# Altium PCB PCB1.PcbDoc (part 7 of 12)
Units mm, origin at the board's own origin, x right, y up, seen from the top; angles counter-clockwise.
Board outline 122.17 x 121.67 mm, 2 copper layers (Top Layer, Bottom Layer); 274 components, 225 nets, 941 pads, 421 vias.
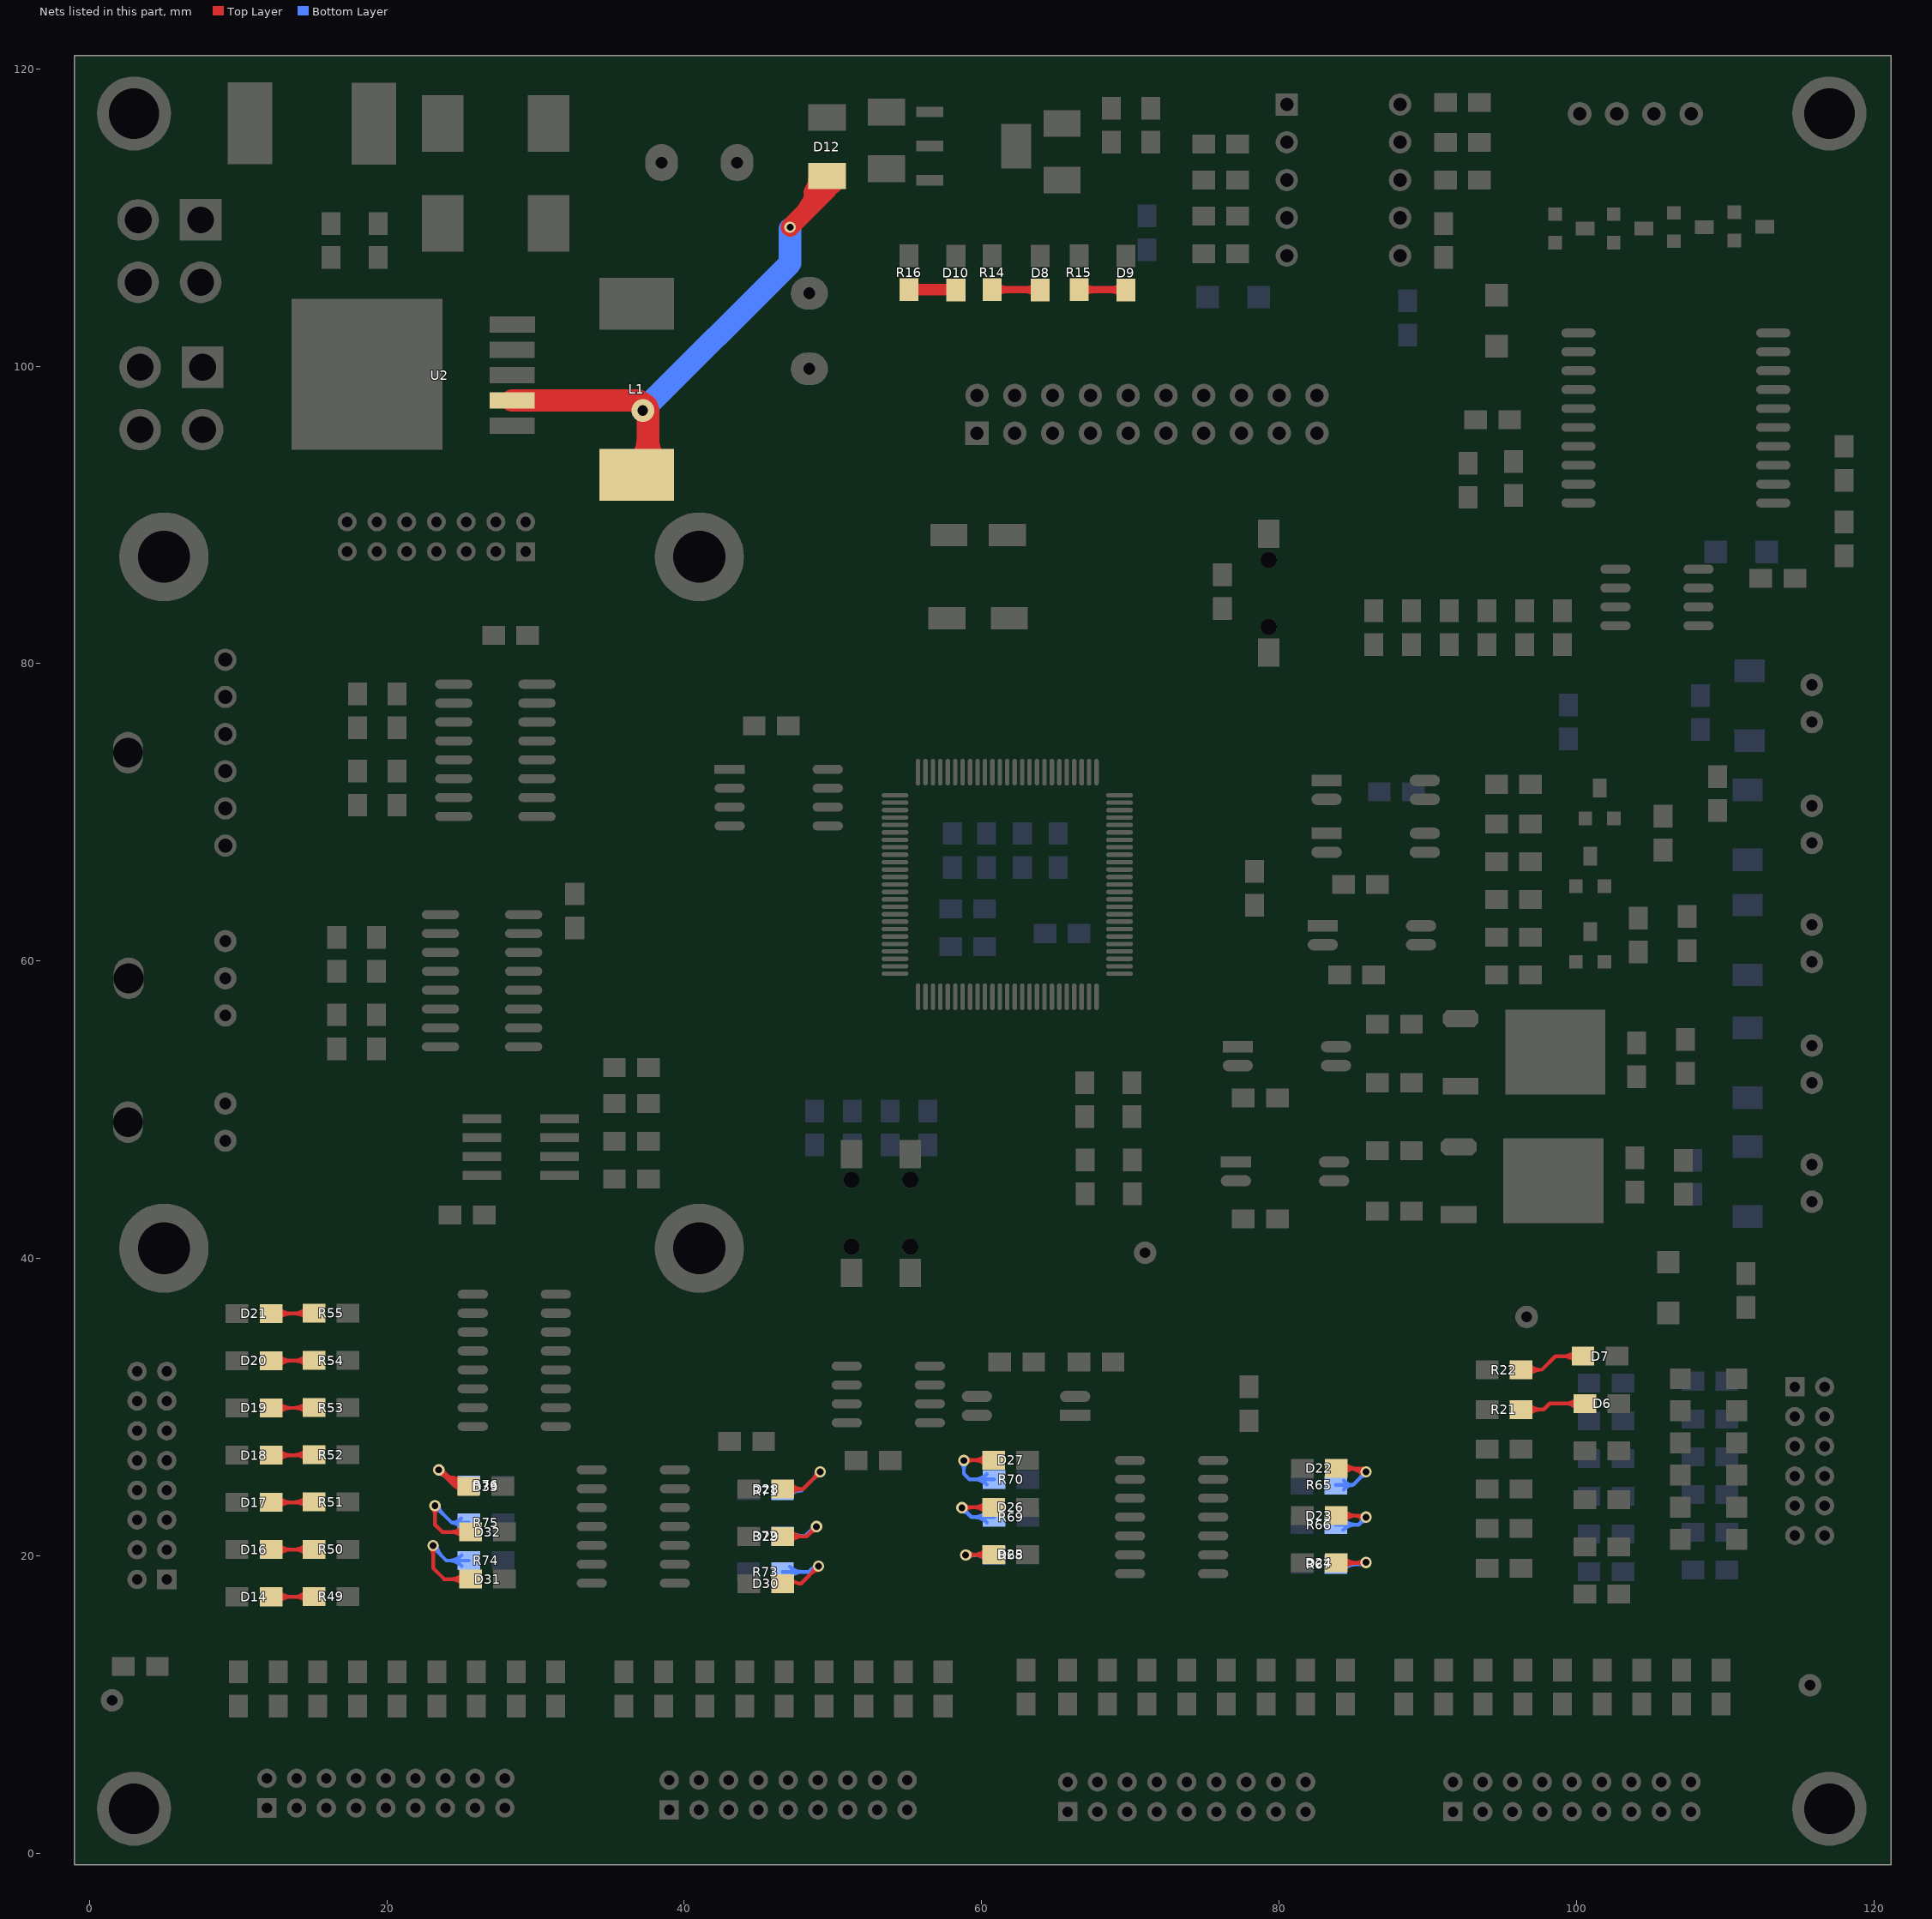
[diagram p7: the nets of this part, all layers, seen from the top]

## Via types
v1: diameter 0.762, hole 0.457, Top Layer to Bottom Layer, 339 vias
v2: diameter 1.27, hole 0.457, Top Layer to Bottom Layer, 39 vias
v3: diameter 0.889, hole 0.457, Top Layer to Bottom Layer, 21 vias
v4: diameter 1.27, hole 0.711, Top Layer to Bottom Layer, 12 vias
v5: diameter 1.524, hole 0.711, Top Layer to Bottom Layer, 5 vias
v6: diameter 1.016, hole 0.457, Top Layer to Bottom Layer, 3 vias
v7: diameter 0.711, hole 0.457, Top Layer to Bottom Layer, 1 vias
v8: diameter 1.524, hole 0.457, Top Layer to Bottom Layer, 1 vias

## Nets (pads, with @x,y where several pads share a name; then routed paths per layer and width w, separated by ;. In a path a pad name is that pad's centre, name@x,y a point inside that pad or via, vN(x,y) a via of type N, cw(c..) or ccw(c..) an arc to the next point about the centre after c; other vN are vias at no path point) (continued)
NetD6_1: D6.1 R21.2 | length 19.9
  Top Layer w0.254: R21.2@96.266,29.845 97.79,29.845 98.194,30.249 D6.1@100.56,30.249 ; R21.2@96.752,29.486 cw(c97.619,28.619) 97.619,29.845 ; R21.2@96.752,29.486 cw(c97.619,28.619) 97.619,29.845 ; R21.2@96.752,29.486 cw(c97.619,28.619) 97.619,29.845 ; R21.2@96.752,29.486 cw(c97.619,28.619) 97.619,29.845 ; R21.2@96.752,30.204 ccw(c97.619,31.071) 97.619,29.845 ; R21.2@96.752,30.204 ccw(c97.619,31.071) 97.619,29.845 ; R21.2@96.752,30.204 ccw(c97.619,31.071) 97.619,29.845 ; R21.2@96.752,30.204 ccw(c97.619,31.071) 97.619,29.845 ; 99.207,30.249 cw(c99.207,29.023) D6.1@100.074,29.89 ; 99.207,30.249 ccw(c99.207,31.476) D6.1@100.074,30.608 ; 99.207,30.249 cw(c99.207,29.023) D6.1@100.074,29.89 ; 99.207,30.249 ccw(c99.207,31.476) D6.1@100.074,30.608 ; 99.207,30.249 cw(c99.207,29.023) D6.1@100.074,29.89 ; 99.207,30.249 ccw(c99.207,31.476) D6.1@100.074,30.608 ; 99.207,30.249 cw(c99.207,29.023) D6.1@100.074,29.89 ; 99.207,30.249 ccw(c99.207,31.476) D6.1@100.074,30.608
NetD7_1: D7.1 R22.2 | length 20
  Top Layer w0.254: R22.2@96.266,32.512 97.663,32.512 98.575,33.424 D7.1@100.433,33.424 ; R22.2@96.752,32.153 cw(c97.619,31.286) 97.619,32.512 ; R22.2@96.752,32.153 cw(c97.619,31.286) 97.619,32.512 ; R22.2@96.752,32.153 cw(c97.619,31.286) 97.619,32.512 ; R22.2@96.752,32.153 cw(c97.619,31.286) 97.619,32.512 ; R22.2@96.752,32.871 ccw(c97.619,33.738) 97.619,32.512 ; R22.2@96.752,32.871 ccw(c97.619,33.738) 97.619,32.512 ; R22.2@96.752,32.871 ccw(c97.619,33.738) 97.619,32.512 ; R22.2@96.752,32.871 ccw(c97.619,33.738) 97.619,32.512 ; 99.08,33.424 cw(c99.08,32.198) D7.1@99.947,33.065 ; 99.08,33.424 ccw(c99.08,34.651) D7.1@99.947,33.783 ; 99.08,33.424 cw(c99.08,32.198) D7.1@99.947,33.065 ; 99.08,33.424 ccw(c99.08,34.651) D7.1@99.947,33.783 ; 99.08,33.424 cw(c99.08,32.198) D7.1@99.947,33.065 ; 99.08,33.424 ccw(c99.08,34.651) D7.1@99.947,33.783 ; 99.08,33.424 cw(c99.08,32.198) D7.1@99.947,33.065 ; 99.08,33.424 ccw(c99.08,34.651) D7.1@99.947,33.783
NetD8_1: D8.1 R14.2 | length 8.9
  Top Layer w0.508: R14.2@60.706,105.156 63.834,105.156 D8.1@63.858,105.132 ; 61.626,105.156 cw(c61.626,106.076) 60.975,105.425 ccw(c61.626,106.076) 61.626,105.156 ; 61.626,105.156 ccw(c61.626,104.236) 60.975,104.887 cw(c61.626,104.236) 61.626,105.156 ; 62.961,105.156 cw(c62.961,104.156) 63.669,104.863 ccw(c62.961,104.156) 62.961,105.156 ; 63.075,105.156 ccw(c63.075,105.995) 63.669,105.402 cw(c63.075,105.995) 63.075,105.156
NetD9_1: D9.1 R15.2 | length 8.9
  Top Layer w0.508: R15.2@66.548,105.156 69.676,105.156 D9.1@69.7,105.132 ; 67.468,105.156 cw(c67.468,106.076) 66.817,105.425 ccw(c67.468,106.076) 67.468,105.156 ; 67.468,105.156 ccw(c67.468,104.236) 66.817,104.887 cw(c67.468,104.236) 67.468,105.156 ; 68.723,105.156 cw(c68.723,104.156) 69.43,104.863 ccw(c68.723,104.156) 68.723,105.156 ; 68.837,105.156 ccw(c68.837,105.995) 69.43,105.402 cw(c68.837,105.995) 68.837,105.156
NetD10_1: D10.1 R16.2 | length 4.3
  Top Layer w0.762: R16.2@55.118,105.156 58.246,105.156 D10.1@58.27,105.132 ; 57.6,105.156 cw(c57.6,104.462) 58.09,104.953 ccw(c57.6,104.462) 57.6,105.156
NetD12_2: D12.2 L1.1 U2.2 | length 73.2
  Top Layer w1.27: L1.1@36.773,93.494 ccw(c34.869,95.398) 37.561,95.398 ccw(c40.253,95.398) L1.1@38.349,93.494 ; v1(47.117,109.347) 49.599,111.829 D12.2@49.599,112.791 ; 47.834,110.064 ccw(c45.106,112.791) D12.2@48.964,112.791 ; 47.834,110.064 ccw(c45.106,112.791) D12.2@48.964,112.791 ; 47.834,110.064 ccw(c45.106,112.791) D12.2@48.964,112.791 ; 47.834,110.064 ccw(c45.106,112.791) D12.2@48.964,112.791 ; 48.669,111.69 cw(c50.07,111.315) D12.2@49.345,112.571 ; 48.669,111.69 cw(c50.07,111.315) D12.2@49.345,112.571 ; 48.669,111.69 cw(c50.07,111.315) D12.2@49.345,112.571 ; 48.669,111.69 cw(c50.07,111.315) D12.2@49.345,112.571 ; 48.669,111.69 cw(c50.07,111.315) D12.2@49.345,112.571 ; 48.669,111.69 cw(c50.07,111.315) D12.2@49.345,112.571 ; D12.2@50.002,112.232 ccw(c49.443,112.791) D12.2@50.234,112.791 ; D12.2@50.002,112.232 ccw(c49.443,112.791) D12.2@50.234,112.791 ; D12.2@50.002,112.232 ccw(c49.443,112.791) D12.2@50.234,112.791 ; D12.2@50.002,112.232 ccw(c49.443,112.791) D12.2@50.234,112.791
  Top Layer w1.524: U2.2@28.433,97.7 36.898,97.7 37.561,97.037 L1.1@37.561,94.107 ; L1.1@36.862,93.405 ccw(c35.176,95.091) 37.561,95.091 ccw(c39.946,95.091) L1.1@38.26,93.405 ; 36.508,97.7 cw(c36.508,96.325) v5@37.48,97.297 ; 36.508,97.7 cw(c36.508,96.325) v5@37.48,97.297 ; 36.508,97.7 cw(c36.508,96.325) v5@37.48,97.297 ; L1.1@36.85,93.405 ccw(c35.135,95.12) 37.561,95.12 cw(c35.135,95.12) L1.1@36.85,93.405 ; 37.561,95.062 ccw(c39.905,95.062) 38.248,93.405 cw(c39.905,95.062) 37.561,95.062
  Bottom Layer w1.524: v5(37.211,97.028) 47.117,106.934 v1@47.117,109.22
NetD14_1: D14.1 R49.1 | length 20.5
  Top Layer w0.254: D14.1@12.216,17.249 15.09,17.249 R49.1@15.113,17.272 ; D14.1@12.702,16.89 cw(c13.569,16.022) 13.569,17.249 ; D14.1@12.702,16.89 cw(c13.569,16.022) 13.569,17.249 ; D14.1@12.702,16.89 cw(c13.569,16.022) 13.569,17.249 ; D14.1@12.702,16.89 cw(c13.569,16.022) 13.569,17.249 ; D14.1@12.702,17.608 ccw(c13.569,18.475) 13.569,17.249 ; D14.1@12.702,17.608 ccw(c13.569,18.475) 13.569,17.249 ; D14.1@12.702,17.608 ccw(c13.569,18.475) 13.569,17.249 ; D14.1@12.702,17.608 ccw(c13.569,18.475) 13.569,17.249 ; 13.704,17.249 ccw(c13.704,18.554) R49.1@14.627,17.631 ; 13.704,17.249 ccw(c13.704,18.554) R49.1@14.627,17.631 ; 13.704,17.249 ccw(c13.704,18.554) R49.1@14.627,17.631 ; 13.704,17.249 ccw(c13.704,18.554) R49.1@14.627,17.631 ; 13.816,17.249 cw(c13.816,16.102) R49.1@14.627,16.913 ; 13.816,17.249 cw(c13.816,16.102) R49.1@14.627,16.913 ; 13.816,17.249 cw(c13.816,16.102) R49.1@14.627,16.913 ; 13.816,17.249 cw(c13.816,16.102) R49.1@14.627,16.913 ; 14.317,17.249 ccw(c14.317,17.941) R49.1@14.806,17.452 ; 14.317,17.249 ccw(c14.317,17.941) R49.1@14.806,17.452 ; 14.317,17.249 ccw(c14.317,17.941) R49.1@14.806,17.452 ; 14.317,17.249 ccw(c14.317,17.941) R49.1@14.806,17.452
NetD16_1: D16.1 R50.1 | length 20.5
  Top Layer w0.254: D16.1@12.216,20.424 15.09,20.424 R50.1@15.113,20.447 ; D16.1@12.702,20.065 cw(c13.569,19.197) 13.569,20.424 ; D16.1@12.702,20.065 cw(c13.569,19.197) 13.569,20.424 ; D16.1@12.702,20.065 cw(c13.569,19.197) 13.569,20.424 ; D16.1@12.702,20.065 cw(c13.569,19.197) 13.569,20.424 ; D16.1@12.702,20.783 ccw(c13.569,21.65) 13.569,20.424 ; D16.1@12.702,20.783 ccw(c13.569,21.65) 13.569,20.424 ; D16.1@12.702,20.783 ccw(c13.569,21.65) 13.569,20.424 ; D16.1@12.702,20.783 ccw(c13.569,21.65) 13.569,20.424 ; 13.704,20.424 ccw(c13.704,21.729) R50.1@14.627,20.806 ; 13.704,20.424 ccw(c13.704,21.729) R50.1@14.627,20.806 ; 13.704,20.424 ccw(c13.704,21.729) R50.1@14.627,20.806 ; 13.704,20.424 ccw(c13.704,21.729) R50.1@14.627,20.806 ; 13.816,20.424 cw(c13.816,19.277) R50.1@14.627,20.088 ; 13.816,20.424 cw(c13.816,19.277) R50.1@14.627,20.088 ; 13.816,20.424 cw(c13.816,19.277) R50.1@14.627,20.088 ; 13.816,20.424 cw(c13.816,19.277) R50.1@14.627,20.088 ; 14.317,20.424 ccw(c14.317,21.116) R50.1@14.806,20.627 ; 14.317,20.424 ccw(c14.317,21.116) R50.1@14.806,20.627 ; 14.317,20.424 ccw(c14.317,21.116) R50.1@14.806,20.627 ; 14.317,20.424 ccw(c14.317,21.116) R50.1@14.806,20.627
NetD17_1: D17.1 R51.1 | length 20.5
  Top Layer w0.254: D17.1@12.216,23.599 15.09,23.599 R51.1@15.113,23.622 ; D17.1@12.702,23.24 cw(c13.569,22.372) 13.569,23.599 ; D17.1@12.702,23.24 cw(c13.569,22.372) 13.569,23.599 ; D17.1@12.702,23.24 cw(c13.569,22.372) 13.569,23.599 ; D17.1@12.702,23.24 cw(c13.569,22.372) 13.569,23.599 ; D17.1@12.702,23.958 ccw(c13.569,24.825) 13.569,23.599 ; D17.1@12.702,23.958 ccw(c13.569,24.825) 13.569,23.599 ; D17.1@12.702,23.958 ccw(c13.569,24.825) 13.569,23.599 ; D17.1@12.702,23.958 ccw(c13.569,24.825) 13.569,23.599 ; 13.704,23.599 ccw(c13.704,24.904) R51.1@14.627,23.981 ; 13.704,23.599 ccw(c13.704,24.904) R51.1@14.627,23.981 ; 13.704,23.599 ccw(c13.704,24.904) R51.1@14.627,23.981 ; 13.704,23.599 ccw(c13.704,24.904) R51.1@14.627,23.981 ; 13.816,23.599 cw(c13.816,22.452) R51.1@14.627,23.263 ; 13.816,23.599 cw(c13.816,22.452) R51.1@14.627,23.263 ; 13.816,23.599 cw(c13.816,22.452) R51.1@14.627,23.263 ; 13.816,23.599 cw(c13.816,22.452) R51.1@14.627,23.263 ; 14.317,23.599 ccw(c14.317,24.291) R51.1@14.806,23.802 ; 14.317,23.599 ccw(c14.317,24.291) R51.1@14.806,23.802 ; 14.317,23.599 ccw(c14.317,24.291) R51.1@14.806,23.802 ; 14.317,23.599 ccw(c14.317,24.291) R51.1@14.806,23.802
NetD18_1: D18.1 R52.1 | length 20.5
  Top Layer w0.254: D18.1@12.216,26.774 15.09,26.774 R52.1@15.113,26.797 ; D18.1@12.702,26.415 cw(c13.569,25.547) 13.569,26.774 ; D18.1@12.702,26.415 cw(c13.569,25.547) 13.569,26.774 ; D18.1@12.702,26.415 cw(c13.569,25.547) 13.569,26.774 ; D18.1@12.702,26.415 cw(c13.569,25.547) 13.569,26.774 ; D18.1@12.702,27.133 ccw(c13.569,28) 13.569,26.774 ; D18.1@12.702,27.133 ccw(c13.569,28) 13.569,26.774 ; D18.1@12.702,27.133 ccw(c13.569,28) 13.569,26.774 ; D18.1@12.702,27.133 ccw(c13.569,28) 13.569,26.774 ; 13.704,26.774 ccw(c13.704,28.079) R52.1@14.627,27.156 ; 13.704,26.774 ccw(c13.704,28.079) R52.1@14.627,27.156 ; 13.704,26.774 ccw(c13.704,28.079) R52.1@14.627,27.156 ; 13.704,26.774 ccw(c13.704,28.079) R52.1@14.627,27.156 ; 13.816,26.774 cw(c13.816,25.627) R52.1@14.627,26.438 ; 13.816,26.774 cw(c13.816,25.627) R52.1@14.627,26.438 ; 13.816,26.774 cw(c13.816,25.627) R52.1@14.627,26.438 ; 13.816,26.774 cw(c13.816,25.627) R52.1@14.627,26.438 ; 14.317,26.774 ccw(c14.317,27.466) R52.1@14.806,26.977 ; 14.317,26.774 ccw(c14.317,27.466) R52.1@14.806,26.977 ; 14.317,26.774 ccw(c14.317,27.466) R52.1@14.806,26.977 ; 14.317,26.774 ccw(c14.317,27.466) R52.1@14.806,26.977
NetD19_1: D19.1 R53.1 | length 20.5
  Top Layer w0.254: D19.1@12.216,29.949 15.09,29.949 R53.1@15.113,29.972 ; D19.1@12.702,29.59 cw(c13.569,28.722) 13.569,29.949 ; D19.1@12.702,29.59 cw(c13.569,28.722) 13.569,29.949 ; D19.1@12.702,29.59 cw(c13.569,28.722) 13.569,29.949 ; D19.1@12.702,29.59 cw(c13.569,28.722) 13.569,29.949 ; D19.1@12.702,30.308 ccw(c13.569,31.175) 13.569,29.949 ; D19.1@12.702,30.308 ccw(c13.569,31.175) 13.569,29.949 ; D19.1@12.702,30.308 ccw(c13.569,31.175) 13.569,29.949 ; D19.1@12.702,30.308 ccw(c13.569,31.175) 13.569,29.949 ; 13.704,29.949 ccw(c13.704,31.254) R53.1@14.627,30.331 ; 13.704,29.949 ccw(c13.704,31.254) R53.1@14.627,30.331 ; 13.704,29.949 ccw(c13.704,31.254) R53.1@14.627,30.331 ; 13.704,29.949 ccw(c13.704,31.254) R53.1@14.627,30.331 ; 13.816,29.949 cw(c13.816,28.802) R53.1@14.627,29.613 ; 13.816,29.949 cw(c13.816,28.802) R53.1@14.627,29.613 ; 13.816,29.949 cw(c13.816,28.802) R53.1@14.627,29.613 ; 13.816,29.949 cw(c13.816,28.802) R53.1@14.627,29.613 ; 14.317,29.949 ccw(c14.317,30.641) R53.1@14.806,30.152 ; 14.317,29.949 ccw(c14.317,30.641) R53.1@14.806,30.152 ; 14.317,29.949 ccw(c14.317,30.641) R53.1@14.806,30.152 ; 14.317,29.949 ccw(c14.317,30.641) R53.1@14.806,30.152
NetD20_1: D20.1 R54.1 | length 20.5
  Top Layer w0.254: D20.1@12.216,33.124 15.09,33.124 R54.1@15.113,33.147 ; D20.1@12.702,32.765 cw(c13.569,31.897) 13.569,33.124 ; D20.1@12.702,32.765 cw(c13.569,31.897) 13.569,33.124 ; D20.1@12.702,32.765 cw(c13.569,31.897) 13.569,33.124 ; D20.1@12.702,32.765 cw(c13.569,31.897) 13.569,33.124 ; D20.1@12.702,33.483 ccw(c13.569,34.35) 13.569,33.124 ; D20.1@12.702,33.483 ccw(c13.569,34.35) 13.569,33.124 ; D20.1@12.702,33.483 ccw(c13.569,34.35) 13.569,33.124 ; D20.1@12.702,33.483 ccw(c13.569,34.35) 13.569,33.124 ; 13.704,33.124 ccw(c13.704,34.429) R54.1@14.627,33.506 ; 13.704,33.124 ccw(c13.704,34.429) R54.1@14.627,33.506 ; 13.704,33.124 ccw(c13.704,34.429) R54.1@14.627,33.506 ; 13.704,33.124 ccw(c13.704,34.429) R54.1@14.627,33.506 ; 13.816,33.124 cw(c13.816,31.977) R54.1@14.627,32.788 ; 13.816,33.124 cw(c13.816,31.977) R54.1@14.627,32.788 ; 13.816,33.124 cw(c13.816,31.977) R54.1@14.627,32.788 ; 13.816,33.124 cw(c13.816,31.977) R54.1@14.627,32.788 ; 14.317,33.124 ccw(c14.317,33.816) R54.1@14.806,33.327 ; 14.317,33.124 ccw(c14.317,33.816) R54.1@14.806,33.327 ; 14.317,33.124 ccw(c14.317,33.816) R54.1@14.806,33.327 ; 14.317,33.124 ccw(c14.317,33.816) R54.1@14.806,33.327
NetD21_1: D21.1 R55.1 | length 20.5
  Top Layer w0.254: D21.1@12.216,36.299 15.09,36.299 R55.1@15.113,36.322 ; D21.1@12.702,35.94 cw(c13.569,35.072) 13.569,36.299 ; D21.1@12.702,35.94 cw(c13.569,35.072) 13.569,36.299 ; D21.1@12.702,35.94 cw(c13.569,35.072) 13.569,36.299 ; D21.1@12.702,35.94 cw(c13.569,35.072) 13.569,36.299 ; D21.1@12.702,36.658 ccw(c13.569,37.525) 13.569,36.299 ; D21.1@12.702,36.658 ccw(c13.569,37.525) 13.569,36.299 ; D21.1@12.702,36.658 ccw(c13.569,37.525) 13.569,36.299 ; D21.1@12.702,36.658 ccw(c13.569,37.525) 13.569,36.299 ; 13.704,36.299 ccw(c13.704,37.604) R55.1@14.627,36.681 ; 13.704,36.299 ccw(c13.704,37.604) R55.1@14.627,36.681 ; 13.704,36.299 ccw(c13.704,37.604) R55.1@14.627,36.681 ; 13.704,36.299 ccw(c13.704,37.604) R55.1@14.627,36.681 ; 13.816,36.299 cw(c13.816,35.152) R55.1@14.627,35.963 ; 13.816,36.299 cw(c13.816,35.152) R55.1@14.627,35.963 ; 13.816,36.299 cw(c13.816,35.152) R55.1@14.627,35.963 ; 13.816,36.299 cw(c13.816,35.152) R55.1@14.627,35.963 ; 14.317,36.299 ccw(c14.317,36.991) R55.1@14.806,36.502 ; 14.317,36.299 ccw(c14.317,36.991) R55.1@14.806,36.502 ; 14.317,36.299 ccw(c14.317,36.991) R55.1@14.806,36.502 ; 14.317,36.299 ccw(c14.317,36.991) R55.1@14.806,36.502
NetD22_1: D22.1 R65.2 | length 37.2
  Top Layer w0.254: D22.1@83.844,25.885 85.621,25.885 v1(85.852,25.654) ; D22.1@84.33,25.526 cw(c85.197,24.658) 85.197,25.885 ; D22.1@84.33,25.526 cw(c85.197,24.658) 85.197,25.885 ; D22.1@84.33,25.526 cw(c85.197,24.658) 85.197,25.885 ; D22.1@84.33,25.526 cw(c85.197,24.658) 85.197,25.885 ; D22.1@84.33,26.244 ccw(c85.197,27.111) 85.197,25.885 ; D22.1@84.33,26.244 ccw(c85.197,27.111) 85.197,25.885 ; D22.1@84.33,26.244 ccw(c85.197,27.111) 85.197,25.885 ; D22.1@84.33,26.244 ccw(c85.197,27.111) 85.197,25.885 ; 84.682,25.885 cw(c84.682,24.484) v1@85.672,25.474 ; 84.682,25.885 cw(c84.682,24.484) v1@85.672,25.474 ; 84.682,25.885 cw(c84.682,24.484) v1@85.672,25.474 ; 84.682,25.885 cw(c84.682,24.484) v1@85.672,25.474 ; 85.167,25.766 ccw(c85.376,26.128) v1@85.672,25.833 ; 85.167,25.766 ccw(c85.376,26.128) v1@85.672,25.833 ; 85.167,25.766 ccw(c85.376,26.128) v1@85.672,25.833 ; 85.167,25.766 ccw(c85.376,26.128) v1@85.672,25.833 ; 85.167,25.766 ccw(c85.376,26.128) v1@85.672,25.833 ; 85.167,25.766 ccw(c85.376,26.128) v1@85.672,25.833 ; 85.295,25.885 cw(c85.295,25.097) v1(85.852,25.654) ; 85.295,25.885 cw(c85.295,25.097) v1(85.852,25.654) ; 85.295,25.885 cw(c85.295,25.097) v1(85.852,25.654) ; 85.295,25.885 cw(c85.295,25.097) v1(85.852,25.654) ; 85.453,25.601 ccw(c85.618,25.887) v1(85.852,25.654) ; 85.453,25.601 ccw(c85.618,25.887) v1(85.852,25.654) ; 85.453,25.601 ccw(c85.618,25.887) v1(85.852,25.654) ; 85.453,25.601 ccw(c85.618,25.887) v1(85.852,25.654) ; 85.453,25.601 ccw(c85.618,25.887) v1(85.852,25.654) ; 85.453,25.601 ccw(c85.618,25.887) v1(85.852,25.654) ; 85.499,25.858 cw(c85.399,25.684) v1@85.599,25.671 ; 85.499,25.858 ccw(c85.599,26.032) v1@85.711,25.865 ; 85.499,25.858 cw(c85.399,25.684) v1@85.599,25.671 ; 85.499,25.858 ccw(c85.599,26.032) v1@85.711,25.865 ; 85.499,25.858 cw(c85.399,25.684) v1@85.599,25.671 ; 85.499,25.858 ccw(c85.599,26.032) v1@85.711,25.865 ; 85.499,25.858 cw(c85.399,25.684) v1@85.599,25.671 ; 85.499,25.858 ccw(c85.599,26.032) v1@85.711,25.865 ; 85.499,25.858 cw(c85.399,25.684) v1@85.599,25.671 ; 85.499,25.858 ccw(c85.599,26.032) v1@85.711,25.865 ; 85.499,25.858 cw(c85.399,25.684) v1@85.599,25.671 ; 85.499,25.858 ccw(c85.599,26.032) v1@85.711,25.865
  Bottom Layer w0.254: R65.2@83.82,24.765 84.963,24.765 ; v1(85.852,25.654) 84.963,24.765 ; R65.2@84.353,24.46 cw(c84.963,24.003) 84.963,24.765 ; R65.2@84.353,24.46 cw(c84.963,24.003) 84.963,24.765 ; R65.2@84.353,24.46 cw(c84.963,24.003) 84.963,24.765 ; R65.2@84.353,24.46 cw(c84.963,24.003) 84.963,24.765 ; R65.2@84.353,25.07 ccw(c84.963,25.527) 84.963,24.765 ; R65.2@84.353,25.07 ccw(c84.963,25.527) 84.963,24.765 ; R65.2@84.353,25.07 ccw(c84.963,25.527) 84.963,24.765 ; R65.2@84.353,25.07 ccw(c84.963,25.527) 84.963,24.765 ; 85.418,25.22 cw(c85.852,24.787) v1@85.852,25.4 ; 85.418,25.22 ccw(c84.985,25.654) v1@85.598,25.654 ; 85.418,25.22 cw(c85.852,24.787) v1@85.852,25.4 ; 85.418,25.22 ccw(c84.985,25.654) v1@85.598,25.654 ; 85.418,25.22 cw(c85.852,24.787) v1@85.852,25.4 ; 85.418,25.22 ccw(c84.985,25.654) v1@85.598,25.654 ; 85.418,25.22 cw(c85.852,24.787) v1@85.852,25.4 ; 85.418,25.22 ccw(c84.985,25.654) v1@85.598,25.654
NetD23_1: D23.1 R66.2 | length 26.6
  Top Layer w0.254: D23.1@83.844,22.71 85.748,22.71 v1(85.852,22.606) ; D23.1@84.33,22.351 cw(c85.197,21.483) 85.197,22.71 ; D23.1@84.33,22.351 cw(c85.197,21.483) 85.197,22.71 ; D23.1@84.33,22.351 cw(c85.197,21.483) 85.197,22.71 ; D23.1@84.33,22.351 cw(c85.197,21.483) 85.197,22.71 ; D23.1@84.33,23.069 ccw(c85.197,23.936) 85.197,22.71 ; D23.1@84.33,23.069 ccw(c85.197,23.936) 85.197,22.71 ; D23.1@84.33,23.069 ccw(c85.197,23.936) 85.197,22.71 ; D23.1@84.33,23.069 ccw(c85.197,23.936) 85.197,22.71 ; 84.988,22.71 cw(c84.988,21.742) v1@85.672,22.426 ; 84.988,22.71 cw(c84.988,21.742) v1@85.672,22.426 ; 84.988,22.71 cw(c84.988,21.742) v1@85.672,22.426 ; 84.988,22.71 cw(c84.988,21.742) v1@85.672,22.426
  Bottom Layer w0.254: R66.2@83.82,22.098 85.344,22.098 v1(85.852,22.606) ; R66.2@84.306,21.739 cw(c85.173,20.872) 85.173,22.098 ; R66.2@84.306,21.739 cw(c85.173,20.872) 85.173,22.098 ; R66.2@84.306,21.739 cw(c85.173,20.872) 85.173,22.098 ; R66.2@84.306,21.739 cw(c85.173,20.872) 85.173,22.098 ; R66.2@84.306,22.457 ccw(c85.173,23.324) 85.173,22.098 ; R66.2@84.306,22.457 ccw(c85.173,23.324) 85.173,22.098 ; R66.2@84.306,22.457 ccw(c85.173,23.324) 85.173,22.098 ; R66.2@84.306,22.457 ccw(c85.173,23.324) 85.173,22.098 ; 85.418,22.172 cw(c85.852,21.739) v1@85.852,22.352 ; 85.418,22.172 ccw(c84.985,22.606) v1@85.598,22.606 ; 85.418,22.172 cw(c85.852,21.739) v1@85.852,22.352 ; 85.418,22.172 ccw(c84.985,22.606) v1@85.598,22.606 ; 85.418,22.172 cw(c85.852,21.739) v1@85.852,22.352 ; 85.418,22.172 ccw(c84.985,22.606) v1@85.598,22.606 ; 85.418,22.172 cw(c85.852,21.739) v1@85.852,22.352 ; 85.418,22.172 ccw(c84.985,22.606) v1@85.598,22.606
NetD24_1: D24.1 R67.2 | length 26.7
  Top Layer w0.254: D24.1@83.844,19.535 85.829,19.535 v1(85.852,19.558) ; D24.1@84.33,19.176 cw(c85.197,18.308) 85.197,19.535 ; D24.1@84.33,19.176 cw(c85.197,18.308) 85.197,19.535 ; D24.1@84.33,19.176 cw(c85.197,18.308) 85.197,19.535 ; D24.1@84.33,19.176 cw(c85.197,18.308) 85.197,19.535 ; D24.1@84.33,19.894 ccw(c85.197,20.761) 85.197,19.535 ; D24.1@84.33,19.894 ccw(c85.197,20.761) 85.197,19.535 ; D24.1@84.33,19.894 ccw(c85.197,20.761) 85.197,19.535 ; D24.1@84.33,19.894 ccw(c85.197,20.761) 85.197,19.535 ; 85.183,19.535 ccw(c85.183,20.227) v1@85.672,19.738 ; 85.183,19.535 ccw(c85.183,20.227) v1@85.672,19.738 ; 85.183,19.535 ccw(c85.183,20.227) v1@85.672,19.738 ; 85.183,19.535 ccw(c85.183,20.227) v1@85.672,19.738 ; 85.295,19.535 cw(c85.295,19.001) v1@85.672,19.378 ; 85.295,19.535 cw(c85.295,19.001) v1@85.672,19.378 ; 85.295,19.535 cw(c85.295,19.001) v1@85.672,19.378 ; 85.295,19.535 cw(c85.295,19.001) v1@85.672,19.378
  Bottom Layer w0.254: R67.2@83.82,19.431 85.725,19.431 v1(85.852,19.558) ; R67.2@84.306,19.072 cw(c85.173,18.205) 85.173,19.431 ; R67.2@84.306,19.072 cw(c85.173,18.205) 85.173,19.431 ; R67.2@84.306,19.072 cw(c85.173,18.205) 85.173,19.431 ; R67.2@84.306,19.072 cw(c85.173,18.205) 85.173,19.431 ; R67.2@84.306,19.79 ccw(c85.173,20.657) 85.173,19.431 ; R67.2@84.306,19.79 ccw(c85.173,20.657) 85.173,19.431 ; R67.2@84.306,19.79 ccw(c85.173,20.657) 85.173,19.431 ; R67.2@84.306,19.79 ccw(c85.173,20.657) 85.173,19.431 ; 84.932,19.431 ccw(c84.932,20.478) v1@85.672,19.738 ; 84.932,19.431 ccw(c84.932,20.478) v1@85.672,19.738 ; 84.932,19.431 ccw(c84.932,20.478) v1@85.672,19.738 ; 84.932,19.431 ccw(c84.932,20.478) v1@85.672,19.738
NetD25_1: D25.1 R68.2 | length 29.1
  Top Layer w0.254: v1(58.928,20.066) 60.786,20.066 D25.1@60.809,20.089 ; v1@59.108,19.886 cw(c59.541,19.453) 59.541,20.066 ; v1@59.108,19.886 cw(c59.541,19.453) 59.541,20.066 ; v1@59.108,19.886 cw(c59.541,19.453) 59.541,20.066 ; v1@59.108,19.886 cw(c59.541,19.453) 59.541,20.066 ; v1@59.108,20.246 ccw(c59.541,20.679) 59.541,20.066 ; v1@59.108,20.246 ccw(c59.541,20.679) 59.541,20.066 ; v1@59.108,20.246 ccw(c59.541,20.679) 59.541,20.066 ; v1@59.108,20.246 ccw(c59.541,20.679) 59.541,20.066 ; 59.4,20.066 ccw(c59.4,21.372) D25.1@60.323,20.448 ; 59.4,20.066 ccw(c59.4,21.372) D25.1@60.323,20.448 ; 59.4,20.066 ccw(c59.4,21.372) D25.1@60.323,20.448 ; 59.4,20.066 ccw(c59.4,21.372) D25.1@60.323,20.448 ; 59.512,20.066 cw(c59.512,18.919) D25.1@60.323,19.73 ; 59.512,20.066 cw(c59.512,18.919) D25.1@60.323,19.73 ; 59.512,20.066 cw(c59.512,18.919) D25.1@60.323,19.73 ; 59.512,20.066 cw(c59.512,18.919) D25.1@60.323,19.73 ; 60.013,20.066 ccw(c60.013,20.758) D25.1@60.503,20.269 ; 60.013,20.066 ccw(c60.013,20.758) D25.1@60.503,20.269 ; 60.013,20.066 ccw(c60.013,20.758) D25.1@60.503,20.269 ; 60.013,20.066 ccw(c60.013,20.758) D25.1@60.503,20.269
  Bottom Layer w0.254: v1(58.928,20.066) R68.2@60.833,20.066 ; v1@59.108,19.886 cw(c59.541,19.453) 59.541,20.066 ; v1@59.108,19.886 cw(c59.541,19.453) 59.541,20.066 ; v1@59.108,19.886 cw(c59.541,19.453) 59.541,20.066 ; v1@59.108,19.886 cw(c59.541,19.453) 59.541,20.066 ; v1@59.108,20.246 ccw(c59.541,20.679) 59.541,20.066 ; v1@59.108,20.246 ccw(c59.541,20.679) 59.541,20.066 ; v1@59.108,20.246 ccw(c59.541,20.679) 59.541,20.066 ; v1@59.108,20.246 ccw(c59.541,20.679) 59.541,20.066 ; 59.48,20.066 cw(c59.48,18.84) R68.2@60.347,19.707 ; 59.48,20.066 ccw(c59.48,21.292) R68.2@60.347,20.425 ; 59.48,20.066 cw(c59.48,18.84) R68.2@60.347,19.707 ; 59.48,20.066 ccw(c59.48,21.292) R68.2@60.347,20.425 ; 59.48,20.066 cw(c59.48,18.84) R68.2@60.347,19.707 ; 59.48,20.066 ccw(c59.48,21.292) R68.2@60.347,20.425 ; 59.48,20.066 cw(c59.48,18.84) R68.2@60.347,19.707 ; 59.48,20.066 ccw(c59.48,21.292) R68.2@60.347,20.425
NetD26_1: D26.1 R69.2 | length 27.7
  Top Layer w0.254: v1(58.674,23.241) 58.697,23.264 D26.1@60.809,23.264 ; v1@58.854,23.061 cw(c59.343,22.572) 59.343,23.264 ; v1@58.854,23.061 cw(c59.343,22.572) 59.343,23.264 ; v1@58.854,23.061 cw(c59.343,22.572) 59.343,23.264 ; v1@58.854,23.061 cw(c59.343,22.572) 59.343,23.264 ; v1@58.854,23.421 ccw(c59.231,23.798) 59.231,23.264 ; v1@58.854,23.421 ccw(c59.231,23.798) 59.231,23.264 ; v1@58.854,23.421 ccw(c59.231,23.798) 59.231,23.264 ; v1@58.854,23.421 ccw(c59.231,23.798) 59.231,23.264 ; 59.456,23.264 cw(c59.456,22.038) D26.1@60.323,22.905 ; 59.456,23.264 ccw(c59.456,24.491) D26.1@60.323,23.623 ; 59.456,23.264 cw(c59.456,22.038) D26.1@60.323,22.905 ; 59.456,23.264 ccw(c59.456,24.491) D26.1@60.323,23.623 ; 59.456,23.264 cw(c59.456,22.038) D26.1@60.323,22.905 ; 59.456,23.264 ccw(c59.456,24.491) D26.1@60.323,23.623 ; 59.456,23.264 cw(c59.456,22.038) D26.1@60.323,22.905 ; 59.456,23.264 ccw(c59.456,24.491) D26.1@60.323,23.623
  Bottom Layer w0.254: v1(58.674,23.241) 59.309,22.606 R69.2@60.833,22.606 ; v1@58.674,22.987 cw(c58.674,22.374) 59.108,22.807 ; v1@58.674,22.987 cw(c58.674,22.374) 59.108,22.807 ; v1@58.674,22.987 cw(c58.674,22.374) 59.108,22.807 ; v1@58.674,22.987 cw(c58.674,22.374) 59.108,22.807 ; v1@58.928,23.241 ccw(c59.541,23.241) 59.108,22.807 ; v1@58.928,23.241 ccw(c59.541,23.241) 59.108,22.807 ; v1@58.928,23.241 ccw(c59.541,23.241) 59.108,22.807 ; v1@58.928,23.241 ccw(c59.541,23.241) 59.108,22.807 ; 59.48,22.606 cw(c59.48,21.38) R69.2@60.347,22.247 ; 59.48,22.606 ccw(c59.48,23.832) R69.2@60.347,22.965 ; 59.48,22.606 cw(c59.48,21.38) R69.2@60.347,22.247 ; 59.48,22.606 ccw(c59.48,23.832) R69.2@60.347,22.965 ; 59.48,22.606 cw(c59.48,21.38) R69.2@60.347,22.247 ; 59.48,22.606 ccw(c59.48,23.832) R69.2@60.347,22.965 ; 59.48,22.606 cw(c59.48,21.38) R69.2@60.347,22.247 ; 59.48,22.606 ccw(c59.48,23.832) R69.2@60.347,22.965
NetD27_1: D27.1 R70.2 | length 28.2
  Top Layer w0.254: v1(58.801,26.416) 58.824,26.439 D27.1@60.809,26.439 ; v1@58.981,26.236 cw(c59.47,25.747) 59.47,26.439 ; v1@58.981,26.236 cw(c59.47,25.747) 59.47,26.439 ; v1@58.981,26.236 cw(c59.47,25.747) 59.47,26.439 ; v1@58.981,26.236 cw(c59.47,25.747) 59.47,26.439 ; v1@58.981,26.596 ccw(c59.358,26.973) 59.358,26.439 ; v1@58.981,26.596 ccw(c59.358,26.973) 59.358,26.439 ; v1@58.981,26.596 ccw(c59.358,26.973) 59.358,26.439 ; v1@58.981,26.596 ccw(c59.358,26.973) 59.358,26.439 ; 59.456,26.439 cw(c59.456,25.213) D27.1@60.323,26.08 ; 59.456,26.439 ccw(c59.456,27.666) D27.1@60.323,26.798 ; 59.456,26.439 cw(c59.456,25.213) D27.1@60.323,26.08 ; 59.456,26.439 ccw(c59.456,27.666) D27.1@60.323,26.798 ; 59.456,26.439 cw(c59.456,25.213) D27.1@60.323,26.08 ; 59.456,26.439 ccw(c59.456,27.666) D27.1@60.323,26.798 ; 59.456,26.439 cw(c59.456,25.213) D27.1@60.323,26.08 ; 59.456,26.439 ccw(c59.456,27.666) D27.1@60.323,26.798
  Bottom Layer w0.254: v1(58.801,26.416) 58.801,25.527 59.182,25.146 R70.2@60.833,25.146 ; v1@58.621,26.236 cw(c58.188,25.803) 58.801,25.803 ; v1@58.621,26.236 cw(c58.188,25.803) 58.801,25.803 ; v1@58.621,26.236 cw(c58.188,25.803) 58.801,25.803 ; v1@58.621,26.236 cw(c58.188,25.803) 58.801,25.803 ; 58.801,25.803 cw(c59.414,25.803) v1@58.981,26.236 ; 58.801,25.803 cw(c59.414,25.803) v1@58.981,26.236 ; 58.801,25.803 cw(c59.414,25.803) v1@58.981,26.236 ; 58.801,25.803 cw(c59.414,25.803) v1@58.981,26.236 ; 59.48,25.146 cw(c59.48,23.92) R70.2@60.347,24.787 ; 59.48,25.146 ccw(c59.48,26.372) R70.2@60.347,25.505 ; 59.48,25.146 cw(c59.48,23.92) R70.2@60.347,24.787 ; 59.48,25.146 ccw(c59.48,26.372) R70.2@60.347,25.505 ; 59.48,25.146 cw(c59.48,23.92) R70.2@60.347,24.787 ; 59.48,25.146 ccw(c59.48,26.372) R70.2@60.347,25.505 ; 59.48,25.146 cw(c59.48,23.92) R70.2@60.347,24.787 ; 59.48,25.146 ccw(c59.48,26.372) R70.2@60.347,25.505
NetD28_1: D28.1 R71.2 | length 31.6
  Top Layer w0.254: D28.1@46.633,24.488 47.983,24.488 ; D28.1@47.119,24.129 cw(c47.983,23.269) 47.983,24.488 ; D28.1@47.119,24.129 cw(c47.983,23.269) 47.983,24.488 ; D28.1@47.119,24.129 cw(c47.983,23.269) 47.983,24.488 ; D28.1@47.119,24.129 cw(c47.983,23.269) 47.983,24.488 ; D28.1@47.119,24.846 ccw(c47.983,25.706) 47.983,24.488 ; D28.1@47.119,24.846 ccw(c47.983,25.706) 47.983,24.488 ; D28.1@47.119,24.846 ccw(c47.983,25.706) 47.983,24.488 ; D28.1@47.119,24.846 ccw(c47.983,25.706) 47.983,24.488 ; 47.983,24.488 v1(49.149,25.654) ; 48.715,25.22 cw(c49.149,24.787) v1@49.149,25.4 ; 48.715,25.22 ccw(c48.282,25.654) v1@48.895,25.654 ; 48.715,25.22 cw(c49.149,24.787) v1@49.149,25.4 ; 48.715,25.22 ccw(c48.282,25.654) v1@48.895,25.654 ; 48.715,25.22 cw(c49.149,24.787) v1@49.149,25.4 ; 48.715,25.22 ccw(c48.282,25.654) v1@48.895,25.654 ; 48.715,25.22 cw(c49.149,24.787) v1@49.149,25.4 ; 48.715,25.22 ccw(c48.282,25.654) v1@48.895,25.654 ; 48.809,25.334 cw(c49.238,25.219) v1(49.149,25.654) ; 48.809,25.334 cw(c49.238,25.219) v1(49.149,25.654) ; 48.809,25.334 cw(c49.238,25.219) v1(49.149,25.654) ; 48.809,25.334 cw(c49.238,25.219) v1(49.149,25.654) ; 48.809,25.334 cw(c49.238,25.219) v1(49.149,25.654) ; 48.809,25.334 cw(c49.238,25.219) v1(49.149,25.654) ; 48.829,25.314 ccw(c48.714,25.743) v1(49.149,25.654) ; 48.829,25.314 ccw(c48.714,25.743) v1(49.149,25.654) ; 48.829,25.314 ccw(c48.714,25.743) v1(49.149,25.654) ; 48.829,25.314 ccw(c48.714,25.743) v1(49.149,25.654) ; 48.829,25.314 ccw(c48.714,25.743) v1(49.149,25.654) ; 48.829,25.314 ccw(c48.714,25.743) v1(49.149,25.654)
  Bottom Layer w0.254: R71.2@46.609,24.384 47.879,24.384 ; v1(49.149,25.654) 47.879,24.384 ; R71.2@47.113,24.044 cw(c47.879,23.352) 47.879,24.384 ; R71.2@47.113,24.044 cw(c47.879,23.352) 47.879,24.384 ; R71.2@47.113,24.044 cw(c47.879,23.352) 47.879,24.384 ; R71.2@47.113,24.724 ccw(c47.879,25.416) 47.879,24.384 ; R71.2@47.113,24.724 ccw(c47.879,25.416) 47.879,24.384 ; R71.2@47.113,24.724 ccw(c47.879,25.416) 47.879,24.384 ; 48.715,25.22 cw(c49.149,24.787) v1@49.149,25.4 ; 48.715,25.22 ccw(c48.282,25.654) v1@48.895,25.654 ; 48.715,25.22 cw(c49.149,24.787) v1@49.149,25.4 ; 48.715,25.22 ccw(c48.282,25.654) v1@48.895,25.654 ; 48.715,25.22 cw(c49.149,24.787) v1@49.149,25.4 ; 48.715,25.22 ccw(c48.282,25.654) v1@48.895,25.654
NetD29_1: D29.1 R72.2 | length 26.9
  Top Layer w0.254: D29.1@46.633,21.313 48.237,21.313 v1(48.895,21.971) ; D29.1@47.119,20.954 cw(c47.986,20.086) 47.986,21.313 ; D29.1@47.119,20.954 cw(c47.986,20.086) 47.986,21.313 ; D29.1@47.119,20.954 cw(c47.986,20.086) 47.986,21.313 ; D29.1@47.119,21.672 ccw(c47.986,22.539) 47.986,21.313 ; D29.1@47.119,21.672 ccw(c47.986,22.539) 47.986,21.313 ; D29.1@47.119,21.672 ccw(c47.986,22.539) 47.986,21.313 ; 48.461,21.537 cw(c48.895,21.104) v1@48.895,21.717 ; 48.461,21.537 ccw(c48.028,21.971) v1@48.641,21.971 ; 48.461,21.537 cw(c48.895,21.104) v1@48.895,21.717 ; 48.461,21.537 ccw(c48.028,21.971) v1@48.641,21.971 ; 48.461,21.537 cw(c48.895,21.104) v1@48.895,21.717 ; 48.461,21.537 ccw(c48.028,21.971) v1@48.641,21.971 ; 48.555,21.651 cw(c48.984,21.536) v1(48.895,21.971) ; 48.555,21.651 cw(c48.984,21.536) v1(48.895,21.971) ; 48.555,21.651 cw(c48.984,21.536) v1(48.895,21.971) ; 48.575,21.631 ccw(c48.46,22.06) v1(48.895,21.971) ; 48.575,21.631 ccw(c48.46,22.06) v1(48.895,21.971) ; 48.575,21.631 ccw(c48.46,22.06) v1(48.895,21.971)
  Bottom Layer w0.254: R72.2@46.609,21.336 48.133,21.336 v1@48.768,21.971 ; R72.2@47.095,20.977 cw(c47.962,20.11) 47.962,21.336 ; R72.2@47.095,20.977 cw(c47.962,20.11) 47.962,21.336 ; R72.2@47.095,20.977 cw(c47.962,20.11) 47.962,21.336 ; R72.2@47.095,21.695 ccw(c47.962,22.562) 47.962,21.336 ; R72.2@47.095,21.695 ccw(c47.962,22.562) 47.962,21.336 ; R72.2@47.095,21.695 ccw(c47.962,22.562) 47.962,21.336 ; 48.245,21.448 cw(c48.895,20.797) v1@48.895,21.717 ; 48.245,21.448 cw(c48.895,20.797) v1@48.895,21.717 ; 48.245,21.448 cw(c48.895,20.797) v1@48.895,21.717 ; 48.5,21.611 ccw(c48.349,22.174) v1(48.895,21.971) ; 48.5,21.611 ccw(c48.349,22.174) v1(48.895,21.971) ; 48.5,21.611 ccw(c48.349,22.174) v1(48.895,21.971) ; 48.551,21.754 ccw(c48.334,21.971) v1@48.641,21.971 ; 48.551,21.754 ccw(c48.334,21.971) v1@48.641,21.971 ; 48.551,21.754 ccw(c48.334,21.971) v1@48.641,21.971
NetD30_1: D30.1 R73.2 | length 22.2
  Top Layer w0.254: D30.1@47.147,18.466 ccw(c47.856,19.066) 47.856,18.138 v1(49.022,19.304) ; 48.588,18.87 cw(c49.022,18.437) v1@49.022,19.05 ; 48.588,18.87 ccw(c48.155,19.304) v1@48.768,19.304 ; 48.588,18.87 cw(c49.022,18.437) v1@49.022,19.05 ; 48.588,18.87 ccw(c48.155,19.304) v1@48.768,19.304 ; 48.588,18.87 cw(c49.022,18.437) v1@49.022,19.05 ; 48.588,18.87 ccw(c48.155,19.304) v1@48.768,19.304 ; 48.588,18.87 cw(c49.022,18.437) v1@49.022,19.05 ; 48.588,18.87 ccw(c48.155,19.304) v1@48.768,19.304 ; 48.682,18.984 cw(c49.111,18.869) v1(49.022,19.304) ; 48.682,18.984 cw(c49.111,18.869) v1(49.022,19.304) ; 48.682,18.984 cw(c49.111,18.869) v1(49.022,19.304) ; 48.682,18.984 cw(c49.111,18.869) v1(49.022,19.304) ; 48.682,18.984 cw(c49.111,18.869) v1(49.022,19.304) ; 48.682,18.984 cw(c49.111,18.869) v1(49.022,19.304) ; 48.702,18.964 ccw(c48.587,19.393) v1(49.022,19.304) ; 48.702,18.964 ccw(c48.587,19.393) v1(49.022,19.304) ; 48.702,18.964 ccw(c48.587,19.393) v1(49.022,19.304) ; 48.702,18.964 ccw(c48.587,19.393) v1(49.022,19.304) ; 48.702,18.964 ccw(c48.587,19.393) v1(49.022,19.304) ; 48.702,18.964 ccw(c48.587,19.393) v1(49.022,19.304)
  Bottom Layer w0.254: R73.2@46.609,18.923 48.387,18.923 ; v1@48.768,19.304 48.387,18.923 ; v1@49.022,19.177 v1(49.022,19.304) ; R73.2@47.095,18.564 cw(c47.962,17.697) 47.962,18.923 ; R73.2@47.095,18.564 cw(c47.962,17.697) 47.962,18.923 ; R73.2@47.095,18.564 cw(c47.962,17.697) 47.962,18.923 ; R73.2@47.095,19.282 ccw(c47.962,20.149) 47.962,18.923 ; R73.2@47.095,19.282 ccw(c47.962,20.149) 47.962,18.923 ; R73.2@47.095,19.282 ccw(c47.962,20.149) 47.962,18.923 ; 48.387,18.923 cw(c48.782,18.529) v1@48.947,19.061 ; 48.387,18.923 cw(c48.782,18.529) v1@48.947,19.061 ; 48.387,18.923 cw(c48.782,18.529) v1@48.947,19.061
NetD31_1: D31.1 R74.2 | length 33.8
  Top Layer w0.254: v1(23.114,20.701) 23.114,19.177 23.853,18.438 D31.1@25.757,18.438 ; v1@22.934,20.521 cw(c22.501,20.088) 23.114,20.088 ; v1@22.934,20.521 cw(c22.501,20.088) 23.114,20.088 ; v1@22.934,20.521 cw(c22.501,20.088) 23.114,20.088 ; v1@22.934,20.521 cw(c22.501,20.088) 23.114,20.088 ; 23.114,20.088 cw(c23.727,20.088) v1@23.294,20.521 ; 23.114,20.088 cw(c23.727,20.088) v1@23.294,20.521 ; 23.114,20.088 cw(c23.727,20.088) v1@23.294,20.521 ; 23.114,20.088 cw(c23.727,20.088) v1@23.294,20.521 ; 24.277,18.438 cw(c24.277,17.212) D31.1@25.144,18.079 ; 24.277,18.438 ccw(c24.277,19.665) D31.1@25.144,18.797 ; 24.277,18.438 cw(c24.277,17.212) D31.1@25.144,18.079 ; 24.277,18.438 ccw(c24.277,19.665) D31.1@25.144,18.797 ; 24.277,18.438 cw(c24.277,17.212) D31.1@25.144,18.079 ; 24.277,18.438 ccw(c24.277,19.665) D31.1@25.144,18.797 ; 24.277,18.438 cw(c24.277,17.212) D31.1@25.144,18.079 ; 24.277,18.438 ccw(c24.277,19.665) D31.1@25.144,18.797
  Bottom Layer w0.254: R74.2@25.527,19.685 24.003,19.685 23.114,20.574 v1(23.114,20.701) ; v1@23.114,20.447 cw(c23.114,20.14) 23.331,20.357 ; v1@23.114,20.447 cw(c23.114,20.14) 23.331,20.357 ; v1@23.114,20.447 cw(c23.114,20.14) 23.331,20.357 ; v1@23.114,20.447 cw(c23.114,20.14) 23.331,20.357 ; v1(23.114,20.701) cw(c22.911,20.155) 23.474,20.306 ; v1(23.114,20.701) cw(c22.911,20.155) 23.474,20.306 ; v1(23.114,20.701) cw(c22.911,20.155) 23.474,20.306 ; v1(23.114,20.701) cw(c22.911,20.155) 23.474,20.306 ; v1(23.114,20.701) cw(c22.911,20.155) 23.474,20.306 ; v1(23.114,20.701) cw(c22.911,20.155) 23.474,20.306 ; v1@23.368,20.701 ccw(c24.288,20.701) 23.637,20.051 ; v1@23.368,20.701 ccw(c24.288,20.701) 23.637,20.051 ; v1@23.368,20.701 ccw(c24.288,20.701) 23.637,20.051 ; v1@23.368,20.701 ccw(c24.288,20.701) 23.637,20.051 ; 24.174,19.685 cw(c24.174,18.459) R74.2@25.041,19.326 ; 24.174,19.685 ccw(c24.174,20.911) R74.2@25.041,20.044 ; 24.174,19.685 cw(c24.174,18.459) R74.2@25.041,19.326 ; 24.174,19.685 ccw(c24.174,20.911) R74.2@25.041,20.044 ; 24.174,19.685 cw(c24.174,18.459) R74.2@25.041,19.326 ; 24.174,19.685 ccw(c24.174,20.911) R74.2@25.041,20.044 ; 24.174,19.685 cw(c24.174,18.459) R74.2@25.041,19.326 ; 24.174,19.685 ccw(c24.174,20.911) R74.2@25.041,20.044
NetD32_1: D32.1 R75.2 | length 27.7
  Top Layer w0.254: v1(23.241,23.368) 23.241,22.098 23.726,21.613 D32.1@25.63,21.613 ; v1@23.061,23.188 cw(c22.628,22.755) 23.241,22.755 ; v1@23.061,23.188 cw(c22.628,22.755) 23.241,22.755 ; v1@23.061,23.188 cw(c22.628,22.755) 23.241,22.755 ; v1@23.061,23.188 cw(c22.628,22.755) 23.241,22.755 ; 23.241,22.755 cw(c23.854,22.755) v1@23.421,23.188 ; 23.241,22.755 cw(c23.854,22.755) v1@23.421,23.188 ; 23.241,22.755 cw(c23.854,22.755) v1@23.421,23.188 ; 23.241,22.755 cw(c23.854,22.755) v1@23.421,23.188 ; 24.277,21.613 cw(c24.277,20.387) D32.1@25.144,21.254 ; 24.277,21.613 ccw(c24.277,22.84) D32.1@25.144,21.972 ; 24.277,21.613 cw(c24.277,20.387) D32.1@25.144,21.254 ; 24.277,21.613 ccw(c24.277,22.84) D32.1@25.144,21.972 ; 24.277,21.613 cw(c24.277,20.387) D32.1@25.144,21.254 ; 24.277,21.613 ccw(c24.277,22.84) D32.1@25.144,21.972 ; 24.277,21.613 cw(c24.277,20.387) D32.1@25.144,21.254 ; 24.277,21.613 ccw(c24.277,22.84) D32.1@25.144,21.972
  Bottom Layer w0.254: v1(23.241,23.368) 24.384,22.225 ; R75.2@25.527,22.225 24.384,22.225 ; v1@23.241,23.114 cw(c23.241,22.501) 23.675,22.934 ; v1@23.241,23.114 cw(c23.241,22.501) 23.675,22.934 ; v1@23.241,23.114 cw(c23.241,22.501) 23.675,22.934 ; v1@23.241,23.114 cw(c23.241,22.501) 23.675,22.934 ; v1@23.495,23.368 ccw(c24.108,23.368) 23.675,22.934 ; v1@23.495,23.368 ccw(c24.108,23.368) 23.675,22.934 ; v1@23.495,23.368 ccw(c24.108,23.368) 23.675,22.934 ; v1@23.495,23.368 ccw(c24.108,23.368) 23.675,22.934 ; 24.384,22.225 cw(c24.384,21.463) R75.2@24.994,21.92 ; 24.384,22.225 ccw(c24.384,22.987) R75.2@24.994,22.53 ; 24.384,22.225 cw(c24.384,21.463) R75.2@24.994,21.92 ; 24.384,22.225 ccw(c24.384,22.987) R75.2@24.994,22.53 ; 24.384,22.225 cw(c24.384,21.463) R75.2@24.994,21.92 ; 24.384,22.225 ccw(c24.384,22.987) R75.2@24.994,22.53 ; 24.384,22.225 cw(c24.384,21.463) R75.2@24.994,21.92 ; 24.384,22.225 ccw(c24.384,22.987) R75.2@24.994,22.53
NetD33_1: D33.1 R76.2 | length 85
  Top Layer w0.254: D33.1@25.503,24.661 24.615,24.661 ; v1@23.495,25.527 cw(c23.495,24.914) 23.929,25.347 ; v1@23.495,25.527 cw(c23.495,24.914) 23.929,25.347 ; v1@23.495,25.527 cw(c23.495,24.914) 23.929,25.347 ; v1@23.495,25.527 cw(c23.495,24.914) 23.929,25.347 ; v1(23.495,25.781) ccw(c23.93,25.87) 23.815,25.441 ; v1(23.495,25.781) ccw(c23.93,25.87) 23.815,25.441 ; v1(23.495,25.781) ccw(c23.93,25.87) 23.815,25.441 ; v1(23.495,25.781) cw(c23.406,25.346) 23.835,25.461 ; v1(23.495,25.781) cw(c23.406,25.346) 23.835,25.461 ; v1(23.495,25.781) cw(c23.406,25.346) 23.835,25.461 ; v1(23.495,25.781) ccw(c25.027,27.313) D33.1@25.31,25.165 ; v1(23.495,25.781) ccw(c23.93,25.87) 23.815,25.441 ; v1(23.495,25.781) ccw(c23.93,25.87) 23.815,25.441 ; v1(23.495,25.781) cw(c23.406,25.346) 23.835,25.461 ; v1(23.495,25.781) cw(c23.406,25.346) 23.835,25.461 ; v1(23.495,25.781) ccw(c25.027,27.313) D33.1@25.31,25.165 ; v1(23.495,25.781) ccw(c23.93,25.87) 23.815,25.441 ; v1(23.495,25.781) cw(c23.406,25.346) 23.835,25.461 ; v1(23.495,25.781) ccw(c25.027,27.313) D33.1@25.31,25.165 ; v1(23.495,25.781) ccw(c25.027,27.313) D33.1@25.31,25.165 ; v1(23.495,25.781) 24.615,24.661 ; v1@23.561,25.536 cw(c23.719,24.943) 24.026,25.474 ; v1@23.561,25.536 cw(c23.719,24.943) 24.026,25.474 ; v1@23.561,25.536 cw(c23.719,24.943) 24.026,25.474 ; v1@23.561,25.536 cw(c23.719,24.943) 24.026,25.474 ; v1@23.561,25.536 cw(c23.719,24.943) 24.026,25.474 ; v1@23.561,25.536 cw(c23.719,24.943) 24.026,25.474 ; v1@23.561,25.536 cw(c23.719,24.943) 24.026,25.474 ; v1@23.561,25.536 cw(c23.719,24.943) 24.026,25.474 ; v1@23.561,25.536 cw(c23.719,24.943) 24.026,25.474 ; v1@23.561,25.536 cw(c23.719,24.943) 24.026,25.474 ; v1@23.74,25.847 ccw(c24.333,26.005) 24.026,25.474 ; v1@23.74,25.847 ccw(c24.333,26.005) 24.026,25.474 ; v1@23.74,25.847 ccw(c24.333,26.005) 24.026,25.474 ; v1@23.74,25.847 ccw(c24.333,26.005) 24.026,25.474 ; v1@23.74,25.847 ccw(c24.333,26.005) 24.026,25.474 ; v1@23.74,25.847 ccw(c24.333,26.005) 24.026,25.474 ; v1@23.74,25.847 ccw(c24.333,26.005) 24.026,25.474 ; v1@23.74,25.847 ccw(c24.333,26.005) 24.026,25.474 ; v1@23.74,25.847 ccw(c24.333,26.005) 24.026,25.474 ; v1@23.74,25.847 ccw(c24.333,26.005) 24.026,25.474 ; v1@23.749,25.781 ccw(c24.362,25.781) 23.929,25.347 ; v1@23.749,25.781 ccw(c24.362,25.781) 23.929,25.347 ; v1@23.749,25.781 ccw(c24.362,25.781) 23.929,25.347 ; v1@23.749,25.781 ccw(c24.362,25.781) 23.929,25.347 ; 23.859,25.417 ccw(c25.112,26.669) D33.1@25.343,24.913 ; 23.859,25.417 ccw(c25.112,26.669) D33.1@25.343,24.913 ; 23.859,25.417 ccw(c25.112,26.669) D33.1@25.343,24.913 ; 23.859,25.417 ccw(c25.112,26.669) D33.1@25.343,24.913 ; 24.223,25.053 ccw(c25.197,26.026) D33.1@25.376,24.661 ; 24.223,25.053 ccw(c25.197,26.026) D33.1@25.376,24.661 ; 24.223,25.053 ccw(c25.197,26.026) D33.1@25.376,24.661 ; 24.223,25.053 ccw(c25.197,26.026) D33.1@25.376,24.661 ; 24.266,25.302 cw(c24.047,23.641) D33.1@25.376,24.661 ; 24.266,25.302 cw(c24.047,23.641) D33.1@25.376,24.661 ; 24.266,25.302 cw(c24.047,23.641) D33.1@25.376,24.661 ; 24.266,25.302 cw(c24.047,23.641) D33.1@25.376,24.661 ; 24.266,25.302 cw(c24.047,23.641) D33.1@25.376,24.661 ; 24.266,25.302 cw(c24.047,23.641) D33.1@25.376,24.661 ; 24.588,24.688 ccw(c25.281,25.382) D33.1@25.41,24.409 ; 24.588,24.688 ccw(c25.281,25.382) D33.1@25.41,24.409 ; 24.588,24.688 ccw(c25.281,25.382) D33.1@25.41,24.409 ; 24.588,24.688 ccw(c25.281,25.382) D33.1@25.41,24.409 ; 24.615,24.661 cw(c24.615,24.344) D33.1@24.907,24.466 ; 24.615,24.661 ccw(c24.615,24.978) D33.1@24.907,24.856 ; 24.615,24.661 cw(c24.615,24.344) D33.1@24.907,24.466 ; 24.615,24.661 ccw(c24.615,24.978) D33.1@24.907,24.856 ; 24.615,24.661 cw(c24.615,24.344) D33.1@24.907,24.466 ; 24.615,24.661 ccw(c24.615,24.978) D33.1@24.907,24.856 ; 24.615,24.661 cw(c24.615,24.344) D33.1@24.907,24.466 ; 24.615,24.661 ccw(c24.615,24.978) D33.1@24.907,24.856 ; 24.67,24.754 cw(c24.638,24.511) D33.1@24.879,24.56 ; 24.67,24.754 ccw(c24.702,24.998) D33.1@24.922,24.888 ; 24.67,24.754 cw(c24.638,24.511) D33.1@24.879,24.56 ; 24.67,24.754 ccw(c24.702,24.998) D33.1@24.922,24.888 ; 24.67,24.754 cw(c24.638,24.511) D33.1@24.879,24.56 ; 24.67,24.754 ccw(c24.702,24.998) D33.1@24.922,24.888 ; 24.67,24.754 cw(c24.638,24.511) D33.1@24.879,24.56 ; 24.67,24.754 ccw(c24.702,24.998) D33.1@24.922,24.888 ; 24.67,24.754 cw(c24.638,24.511) D33.1@24.879,24.56 ; 24.67,24.754 ccw(c24.702,24.998) D33.1@24.922,24.888 ; 24.67,24.754 cw(c24.638,24.511) D33.1@24.879,24.56 ; 24.67,24.754 ccw(c24.702,24.998) D33.1@24.922,24.888 ; 24.688,25.189 cw(c24.392,24.803) D33.1@24.874,24.734 ; 24.688,25.189 ccw(c24.984,25.575) D33.1@25.176,25.128 ; 24.688,25.189 cw(c24.392,24.803) D33.1@24.874,24.734 ; 24.688,25.189 ccw(c24.984,25.575) D33.1@25.176,25.128 ; 24.688,25.189 cw(c24.392,24.803) D33.1@24.874,24.734 ; 24.688,25.189 ccw(c24.984,25.575) D33.1@25.176,25.128 ; 24.688,25.189 cw(c24.392,24.803) D33.1@24.874,24.734 ; 24.688,25.189 ccw(c24.984,25.575) D33.1@25.176,25.128 ; D33.1@24.78,24.987 ccw(c24.83,25.373) D33.1@25.067,25.064 ; D33.1@24.78,24.987 ccw(c24.83,25.373) D33.1@25.067,25.064 ; D33.1@24.78,24.987 ccw(c24.83,25.373) D33.1@25.067,25.064 ; D33.1@24.78,24.987 ccw(c24.83,25.373) D33.1@25.067,25.064 ; D33.1@24.78,24.987 ccw(c24.83,25.373) D33.1@25.067,25.064 ; D33.1@24.78,24.987 ccw(c24.83,25.373) D33.1@25.067,25.064 ; D33.1@24.821,24.982 cw(c24.712,24.151) D33.1@25.376,24.661 ; D33.1@24.821,24.982 cw(c24.712,24.151) D33.1@25.376,24.661 ; D33.1@24.821,24.982 cw(c24.712,24.151) D33.1@25.376,24.661 ; D33.1@24.821,24.982 cw(c24.712,24.151) D33.1@25.376,24.661 ; D33.1@24.821,24.982 cw(c24.712,24.151) D33.1@25.376,24.661 ; D33.1@24.821,24.982 cw(c24.712,24.151) D33.1@25.376,24.661 ; D33.1@24.874,25.222 cw(c24.735,24.169) D33.1@25.578,24.816 ; D33.1@24.874,25.222 cw(c24.735,24.169) D33.1@25.578,24.816 ; D33.1@24.874,25.222 cw(c24.735,24.169) D33.1@25.578,24.816 ; D33.1@24.874,25.222 cw(c24.735,24.169) D33.1@25.578,24.816 ; D33.1@24.874,25.222 cw(c24.735,24.169) D33.1@25.578,24.816 ; D33.1@24.874,25.222 cw(c24.735,24.169) D33.1@25.578,24.816
  Bottom Layer w0.254: v1(23.495,25.781) 24.511,24.765 ; R76.2@25.527,24.765 24.511,24.765 ; v1@23.495,25.527 cw(c23.495,24.914) 23.929,25.347 ; v1@23.495,25.527 cw(c23.495,24.914) 23.929,25.347 ; v1@23.495,25.527 cw(c23.495,24.914) 23.929,25.347 ; v1@23.495,25.527 cw(c23.495,24.914) 23.929,25.347 ; v1@23.749,25.781 ccw(c24.362,25.781) 23.929,25.347 ; v1@23.749,25.781 ccw(c24.362,25.781) 23.929,25.347 ; v1@23.749,25.781 ccw(c24.362,25.781) 23.929,25.347 ; v1@23.749,25.781 ccw(c24.362,25.781) 23.929,25.347 ; 24.511,24.765 cw(c24.511,24.241) R76.2@24.962,24.507 ; 24.511,24.765 ccw(c24.511,25.289) R76.2@24.962,25.023 ; 24.511,24.765 cw(c24.511,24.241) R76.2@24.962,24.507 ; 24.511,24.765 ccw(c24.511,25.289) R76.2@24.962,25.023 ; 24.511,24.765 cw(c24.511,24.241) R76.2@24.962,24.507 ; 24.511,24.765 ccw(c24.511,25.289) R76.2@24.962,25.023 ; 24.511,24.765 cw(c24.511,24.241) R76.2@24.962,24.507 ; 24.511,24.765 ccw(c24.511,25.289) R76.2@24.962,25.023